# Altium PCB PCB1_lack.PcbDoc
Units mm, origin at the board's own origin, x right, y up, seen from the top; angles counter-clockwise.
Board outline 80.5 x 70 mm, 2 copper layers (Top Layer, Bottom Layer); 29 components, 19 nets, 81 pads, 17 vias.
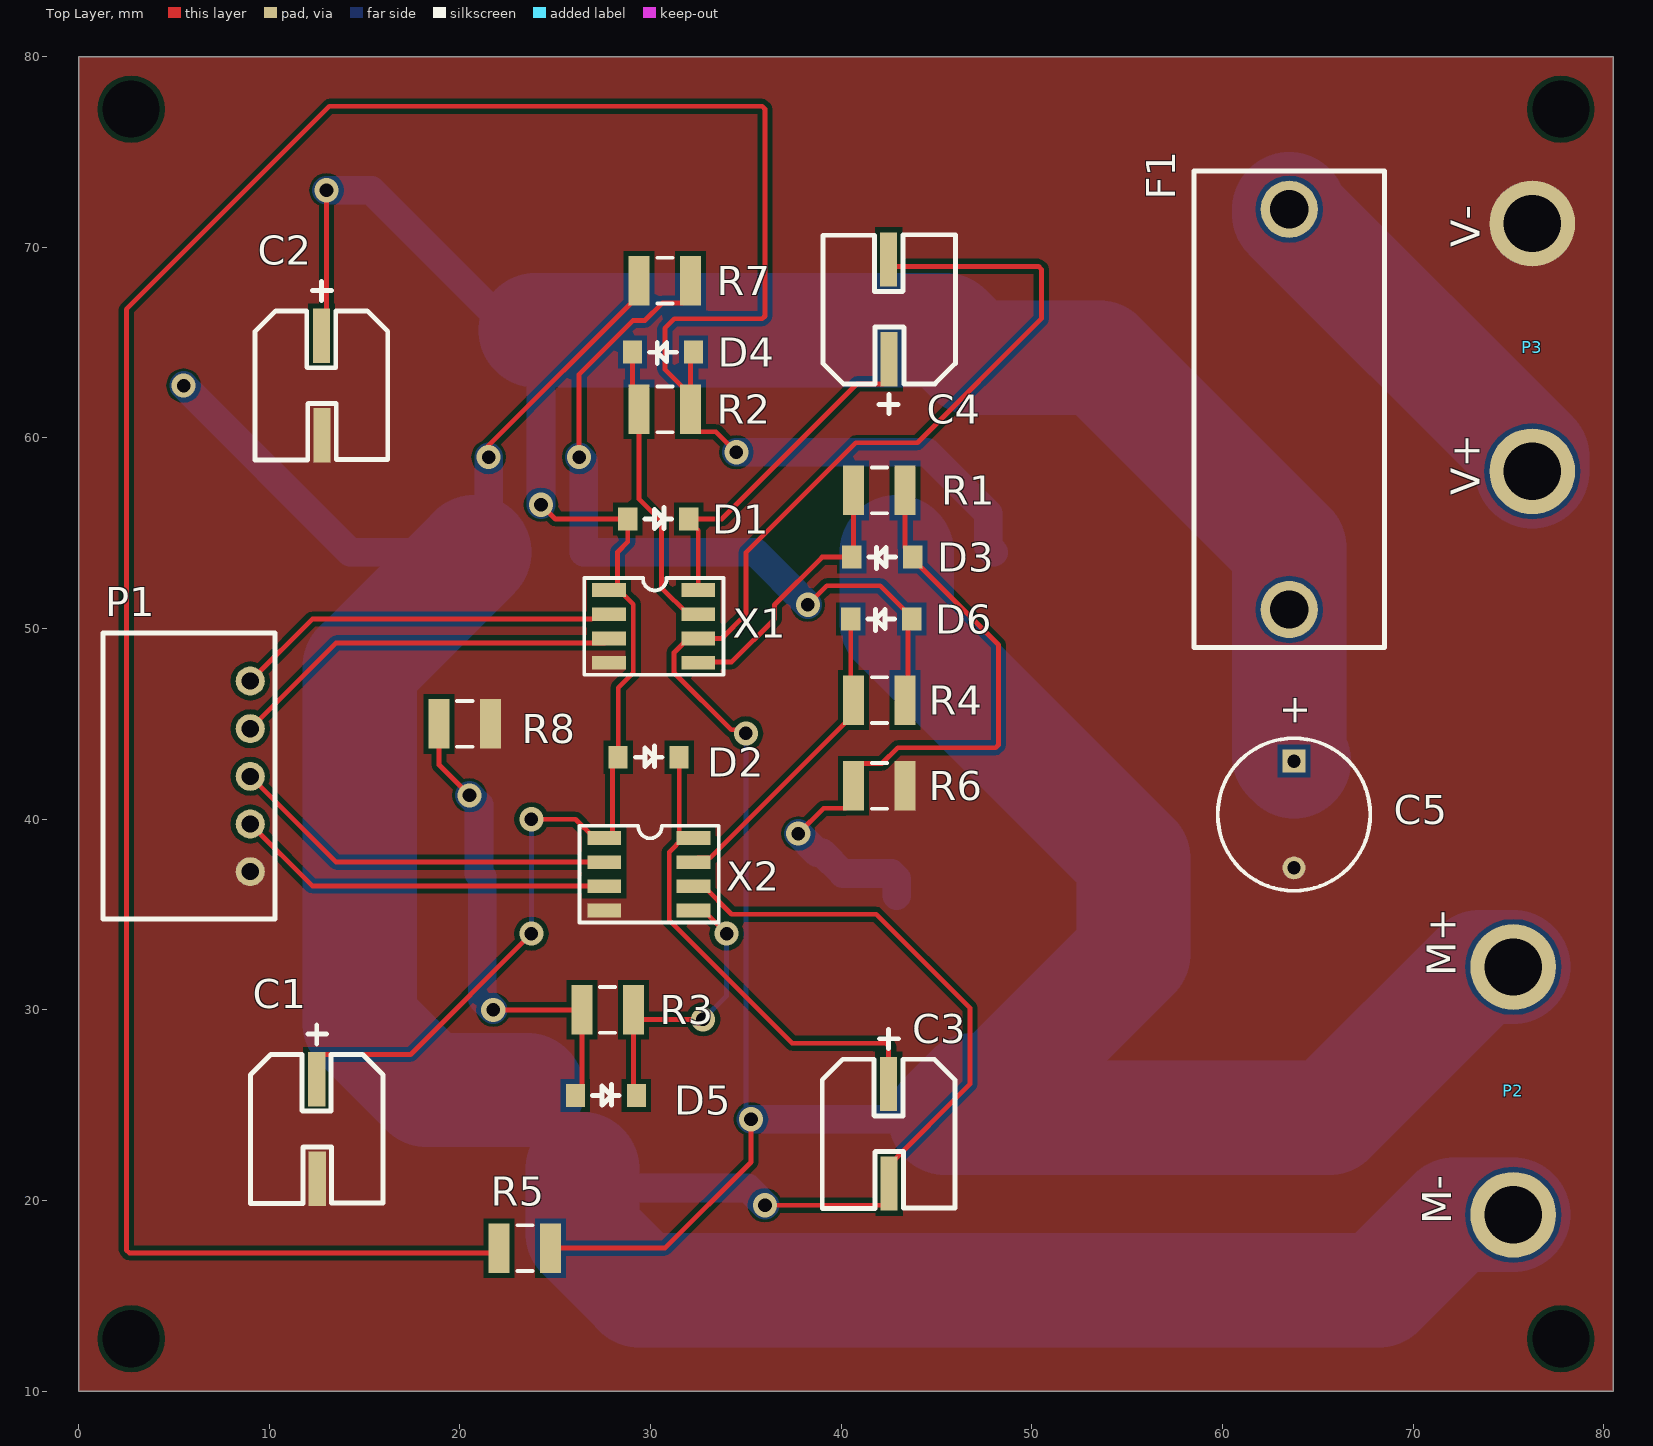
[diagram p0: Top Layer view]
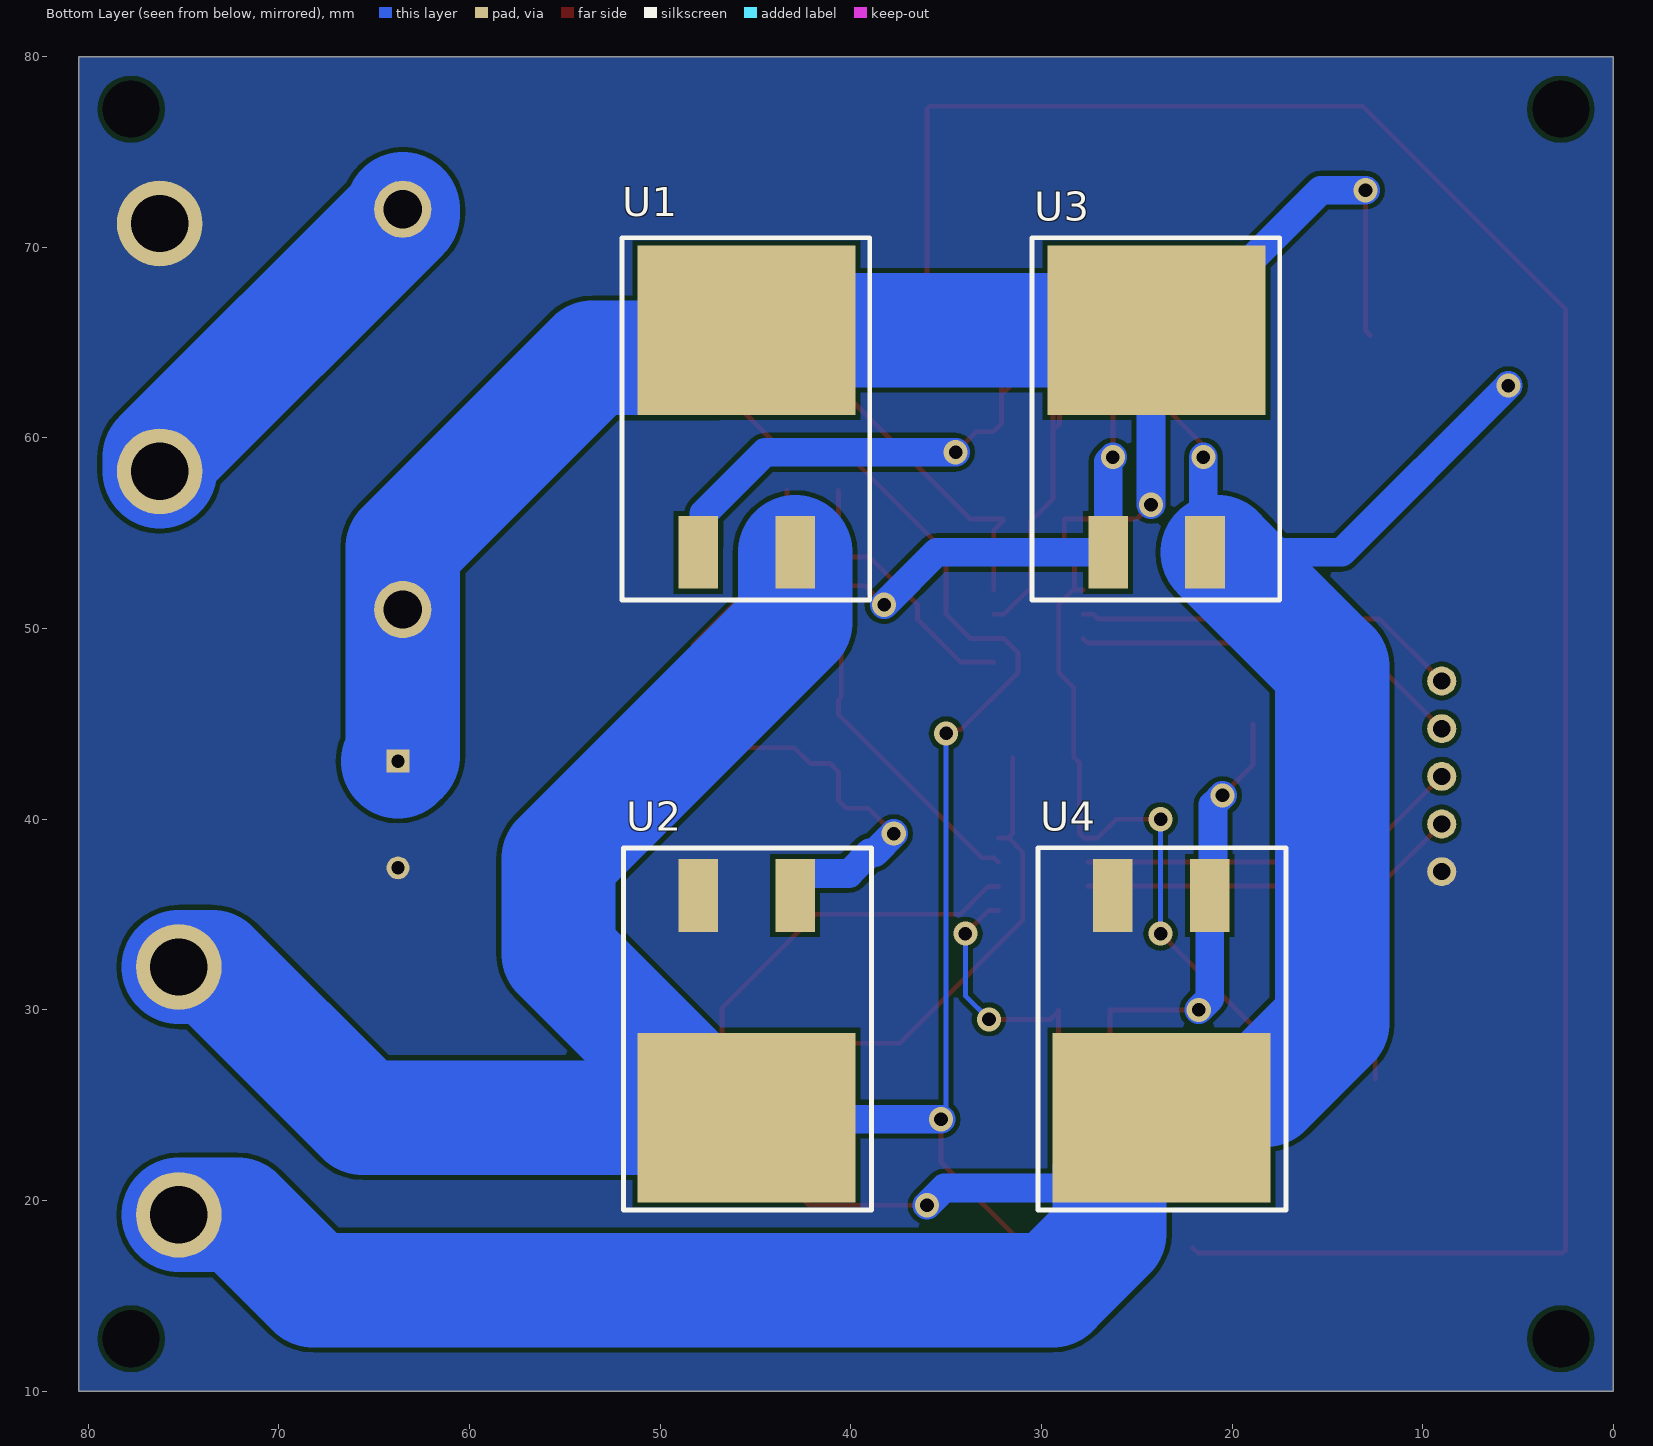
[diagram p1: Bottom Layer view, seen from below]

## Layer stack, top to bottom
Top Solder: solder mask 0.0102, Solder Resist, Dk 3.5
Top Layer: signal copper 0.0356
Dielectric 1: dielectric 0.32, FR-4, Dk 4.8
Bottom Layer: signal copper 0.0356
Bottom Solder: solder mask 0.0102, Solder Resist, Dk 3.5

## Board outline
0,10 0,80 80.5,80 80.5,10

## Design rules (kind name [scope] priority, off if disabled: settings)
Clearance [All] p1: gap=0.254 ignorepadtopadclearanceinfootprint=FALSE except(0: Arc-Hole Track-Hole SMDPad-Hole THPad-Hole Via-Hole Fill-Hole Poly-Hole Region-Hole Text-Hole)
PolygonConnect [All] p1: connectstyle=Direct reliefconductorwidth=0.254 reliefentries=4 polygonreliefangle="90 Angle" airgapwidth=0.254
RoutingVias [All] p1: holewidth=0.711 width=1.27 viastyle="Through Hole" minholewidth=0.711 minwidth=1.27 maxholewidth=0.711 maxwidth=1.27
SolderMaskExpansion [All] p1: expansion=0.102 istentingtop=FALSE
Width [All] p1: maxlimit=6 minlimit=0.254 preferedwidth=1.5 toplayer_prefwidth=0.254 minimp=50.000000 maximp=50.000000 favimp=50.000000
30 further rules are at their usual default settings.

## Components (designator, comment, footprint, x,y, rotation, side; value= is the part's Value field where it differs from the comment)
C1 "16V" "smd cap" 12.5,23.75 r180 top value="10 uF"
C2 "16V" "smd cap" 12.75,62.75 r180 top value="10 uF"
C3 "16V" "smd cap" 42.5,23.5 r180 top value=47uF
C4 "16V" "smd cap" 42.5,66.75 r0 top value=47uF
C5 "Cap Pol1" "Cap El" 63.75,40.25 r90 top value=25V
D1 "Diode" SOD123 28.8,55.75 r0 top
D2 "Diode" SOD123 28.3,43.25 r0 top
D3 "Diode" SOD123 43.75,53.75 r180 top
D4 "Diode" SOD123 32.25,64.5 r180 top
D5 "Diode" SOD123 26.05,25.5 r0 top
D6 "Diode" SOD123 43.7,50.5 r180 top
F1 "Fuse" FH-101 63.5,61.5 r90 top
P1 "jst5" JST5 9,47.25 r270 top
P2 "M_p" M_pin 75.25,25.75 r270 top
P3 "V_p" V_pin 176.25,700.75 r90 top
R1 "10 Om" 14-1210 42,57.25 r0 top value=1K
R2 "10 Om" 14-1210 30.75,61.5 r0 top
R3 "Res3" 14-1210 27.75,30 r180 top value="10 Om"
R4 "10 Om" 14-1210 42,46.25 r0 top value=1K
R5 "1 kOm" 14-1210 23.4,17.5 r180 top value=1K
R6 "Res3" 14-1210 42,41.75 r180 top value="1 kOm"
R7 "1 kOm" 14-1210 30.75,68.25 r0 top value=1K
R8 "1 kOm" 14-1210 20.25,45 r0 top value=1K
U1 "MOSFET" SMD220_10CTQ150 48,54 r180 bottom
U2 "MOSFET" SMD220_10CTQ150 42.92,36 r0 bottom
U3 "MOSFET" SMD220_10CTQ150 26.5,54 r180 bottom
U4 "MOSFET" SMD220_10CTQ150 21.17,36 r0 bottom
X1 "International Rectifier" SOIC8 27.82,52.02 r0 top
X2 "International Rectifier" SOIC8 27.57,39.02 r0 top

## Footprints (in the part's own frame and the unit in brackets; to place one, negate y for a bottom-side part, rotate by r counter-clockwise, add the part's x,y. Pads: shape width x height; smd on the part's side, far side on the other; paste and mask are expansions set on the pad)
14-1210 [mm] "Chip Resistor, Body 3.2x2.5mm, IPC High Density"
  rect 1.1x2.6 smd: 1(-1.35,0) 2(1.35,0)
  silkscreen extent -0.4,-1.2 0.4,1.2, body extent -1.68,-1.32 1.68,1.32, height 0.9
"Cap El" [mm] "Polarized Capacitor (Radial); 2 Leads"
  rect 1.2x1.2 hole 0.7: 1(2.8,0)
  round 1.2 hole 0.7: 2(-2.8,0)
  silkscreen extent -4,-4 4,4
FH-101 [mm]
  round 3 hole 2 paste+0.1: 1(-10.5,0) 2(10.5,0)
  silkscreen extent -12.5,-5 12.5,5
JST5 [mil]
  round 60 hole 35.43: 1(0,0) 2(98.43,0) 3(196.85,0) 4(295.28,0) 5(393.7,0)
  silkscreen extent -99,-304 491,51
M_pin [mm]
  round 4.5 hole 3 mask+0.2: 1(-6.5,0) 2(6.5,0)
SMD220_10CTQ150 [mm]
  rect 2.08x3.81 smd paste+0.1: 1(0,0) 3(5.08,0)
  rect 11.43x8.89 smd paste+0.1: 2(2.54,11.65)
  silkscreen extent -4,-2.5 9,16.5, body extent -2.5,-0.5 7.5,14.5, height 4.69
"smd cap" [mm]
  rect 0.9x2.85 smd: 1(0.013,-2.612) 2(-0.012,2.612)
  silkscreen extent -3.46,-5.46 3.5,3.91
SOD123 [mm]
  rect 1x1.2 smd: 1(0,0) 2(3.2,0)
  silkscreen extent 0.9,-0.5 2.3,0.6
SOIC8 [mm]
  rect 1.78x0.72 smd: 1(0,0) 2(0,-1.27) 3(0,-2.54) 4(0,-3.81) 5(4.68,-3.81) 6(4.68,-2.54) 7(4.68,-1.27) 8(4.68,0)
  silkscreen extent -1.3,-4.44 6,0.64, body extent -0.9,-4.45 5.58,0.63, height 1.75
V_pin [mm]
  round 4.5 hole 3 mask+0.2: 1(-642.5,100) 2(-629.5,100)

## Part data
C1 C2 C3 C4 C5: library part "Cap smd", "Polarized Capacitor (Radial)", LatestRevisionDate=17-Jul-2002, LatestRevisionNote="Re-released for DXP Platform.", PackageDescription="Polarized Capacitor (Radial); 2 Leads", PackageReference=RB7.6-15, Published=8-Jun-2000, Publisher="Altium Limited"
D1 D2 D3 D4 D5 D6: "Default Diode", Code_JEDEC=DO-214-AB, LatestRevisionDate=17-Jul-2002, LatestRevisionNote="Re-released for DXP Platform.", PackageDescription="DO-214-AB/SMC; 2 C-Bend Leads; Body 7.9 x 5.9 mm, inc. leads (LxW)", PackageReference=SMC, PackageVersion=Sep-1996, Published=8-Jun-2000, Publisher="Altium Limited"
F1: library part FH-101
P1: "Header, 5-Pin", LatestRevisionDate=17-Jul-2002, LatestRevisionNote="Re-released for DXP Platform.", Publisher="Altium Limited"
R1 R2 R4 R5 R7 R8: library part Res3, "Resistor", LatestRevisionDate=29-May-2009, LatestRevisionNote="IPC-7351 Footprint Added.", PackageDescription="Chip Resistor", PackageReference=J1-0603, Published=8-Jun-2000, Publisher="Altium Limited"
R3 R6: "Resistor", LatestRevisionDate=29-May-2009, LatestRevisionNote="IPC-7351 Footprint Added.", PackageDescription="Chip Resistor", PackageReference=J1-0603, Published=8-Jun-2000, Publisher="Altium Limited"
U1 U2 U3 U4: library part IRFZ14PBF, Configuration=Single, Qg=11nC, Qgd=5.8nC, Qgs=3.1nC, Vds=60V
X1 X2: library part IR2101SPBF

## Free pads (board coordinates)
  round 1.524 hole 3: 1(2.75,77.25) 2(77.75,77.25) 3(77.75,12.75) 4(2.75,12.75)

## Via types
v1: diameter 1.27, hole 0.711, Top Layer to Bottom Layer, 17 vias

## Nets (pads, with @x,y where several pads share a name; then routed paths per layer and width w, separated by ;. In a path a pad name is that pad's centre, name@x,y a point inside that pad or via, vN(x,y) a via of type N, cw(c..) or ccw(c..) an arc to the next point about the centre after c; other vN are vias at no path point)
GND: C1.2 C2.2 C5.2 P1.5 P3.2 R6.1 R8.2 U2.3 U4.3 X1.4 X2.4
NetC1_1: C1.1 C2.1 C5.1 D1.1 D2.1 F1.1 U1.2 U3.2 X1.1 X2.1 | length 135.1
  Top Layer w0.254: C1.1 12.487,27.337 12.81,27.66 17.41,27.66 v1(23.75,34) ; C2.1 13,65.625 v1(13,73) ; v1(23.75,40) 26.06,40 27.04,39.02 27.767,39.02 28,39.253 28,42.95 D2.1 28.3,46.901 29.091,47.692 29.091,51.279 28.35,52.02 X1.1 ; v1(24.25,56.5) 25,55.75 D1.1 28.8,54.7 28.8,54.55 28.265,54.015 X1.1@28.265,52.105
  Bottom Layer w0.254: v1(23.75,34) v1(23.75,40)
  Bottom Layer w1.5: v1(13,73) 15.34,73 22.69,65.65 U3.2 24.25,65.36 v1(24.25,56.5)
  Bottom Layer w6: U3.2 U1.2 46.905,64.205 53.545,64.205 63.5,54.25 F1.1 63.5,43.3 C5.1
NetC3_1: C3.1 D2.2 X2.8 | length 25.7
  Top Layer w0.254: D2.2 31.5,39.253 X2.8@31.733,39.02 ; X2.8 X2.8@31.733,39.02 ; C3.1 42.488,28.101 42.339,28.25 37.421,28.25 30.979,34.692 30.979,38.279 31.72,39.02 X2.8@31.733,39.02
NetC3_2: C3.2 P2.2 R7.1 U3.3 U4.2 X2.6 | length 179.7
  Top Layer w0.254: v1(21.5,59) 21.43,59.07 21.43,59.53 29.4,67.5 R7.1 ; X2.6 32.78,36.48 34.244,35.016 41.835,35.016 46.75,30.101 46.75,26.1 42.513,21.863 C3.2 42.513,20.073 42.19,19.75 v1(36,19.75)
  Bottom Layer w1.5: v1(5.5,62.75) 14.25,54 U3.3@20.75,54 ; U3.3 U3.3@20.75,54 ; v1(21.5,59) 21.5,54.75 U3.3@20.75,54 ; U4.2 26.425,21.635 27.405,20.655 35.095,20.655 v1(36,19.75)
  Bottom Layer w6: U3.3@20.75,54 14.746,47.996 14.746,29.314 18.265,25.795 U4.2@23.535,25.795 ; U4.2@26.425,21.635 26.425,18.289 29.414,15.3 68.2,15.3 72.15,19.25 P2.2
NetC4_1: C4.1 D1.2 X1.8 | length 18.5
  Top Layer w0.254: X1.8 32.5,55.15 32,55.65 D1.2 33.737,55.75 40.826,62.839 42.189,62.839 42.512,63.162 C4.1
NetC4_2: C4.2 P2.1 R5.1 U1.3 U2.2 X1.6 | length 163.3
  Top Layer w0.254: R5.1 30.75,17.5 35.266,22.016 v1(35.266,24.266) ; v1(35,44.5) 34.806,44.694 34.227,44.694 31.229,47.692 31.229,48.739 31.97,49.48 X1.6 33.73,49.48 35,50.75 35,53.989 40.761,59.75 44,59.75 50.5,66.25 50.5,68.851 50.351,69 42.81,69 42.487,69.323 C4.2
  Bottom Layer w0.254: v1(35,44.5) 35,24.807 35.266,24.541 v1(35.266,24.266)
  Bottom Layer w1.5: v1(35.266,24.266) 45.376,24.266 U2.2
  Bottom Layer w6: U1.3 42.92,50.33 55.33,37.92 55.33,32.95 48.175,25.795 46.905,25.795 U2.2 48.175,24.35 65.6,24.35 73.5,32.25 P2.1
NetD3_1: D3.1 R1.2 R6.2 U2.1 | length 35.7
  Top Layer w0.254: v1(37.75,39.25) 39.077,40.577 40.227,40.577 40.65,41 R6.2 40.65,42.5 41.073,42.923 42.134,42.923 42.961,43.75 48.101,43.75 48.25,43.899 48.25,49.15 43.75,53.65 D3.1 43.75,53.85 43.35,54.25 R1.2
  Bottom Layer w1.5: v1(37.75,39.25) 38.75,38.25 39,38.25 40.095,37.155 42.63,37.155 42.92,36.865 U2.1
NetD3_2: D3.2 R1.1 X1.5 | length 14.3
  Top Layer w0.254: X1.5 32.54,48.25 34.25,48.25 36.5,50.5 36.5,51.25 39,53.75 D3.2 40.65,53.85 R1.1
NetD4_1: D4.1 R2.2 R5.2 U1.1 | length 151
  Top Layer w0.254: R5.2 21.8,17.25 2.649,17.25 2.5,17.399 2.5,66.75 13.149,77.399 35.851,77.399 36,77.25 36,66.399 35.851,66.25 31.25,66.25 30.75,65.75 30.75,63.6 R2.2@32.1,62.25 ; D4.1 32.1,64.35 R2.2@32.1,62.25 ; v1(34.5,59.25) 33.423,60.327 32.523,60.327 32.1,60.75 R2.2 R2.2@32.1,62.25
  Bottom Layer w1.5: v1(34.5,59.25) 44.5,59.25 47.71,56.04 47.71,54.29 U1.1
NetD4_2: D4.2 R2.1 X1.7 | length 16.4
  Top Layer w0.254: D4.2 29.05,60.75 R2.1@29.3,60.5 ; R2.1 29.4,56.789 30.569,55.62 30.569,52.151 31.97,50.75 X1.7
NetD5_1: D5.1 R3.2 R8.1 U4.1 | length 25.5
  Top Layer w0.254: R8.1 18.9,42.85 v1(20.5,41.25) ; v1(21.75,30) R3.2 26.4,25.85 D5.1
  Bottom Layer w1.5: v1(20.5,41.25) 21,40.75 21,37.155 21.17,36.985 21.17,30.58 v1(21.75,30)
NetD5_2: D5.2 R3.1 X2.5 | length 15.6
  Top Layer w0.254: R3.1 R3.1@29.1,29.923 ; D5.2 29.1,25.65 R3.1@29.1,29.923 ; X2.5 32.78,35.21 33.882,34.108 33.882,34.102 v1(33.984,34) ; v1(32.75,29.5) 29.523,29.5 R3.1@29.1,29.923
  Bottom Layer w0.254: v1(32.75,29.5) 33.984,30.734 v1(33.984,34)
NetD6_1: D6.1 R4.2 R7.2 U3.1 | length 41.7
  Top Layer w0.254: v1(26.25,59) 26.25,63.339 29.079,66.167 29.706,66.167 30.616,67.077 31.677,67.077 32.1,67.5 R7.2 ; v1(38.25,51.25) 39.25,52.25 42.05,52.25 43.7,50.6 D6.1 43.5,50.3 43.5,46.4 R4.2
  Bottom Layer w1.5: v1(26.25,59) 26.5,58.75 U3.1 35.5,54 v1(38.25,51.25)
NetD6_2: D6.2 R4.1 X2.7 | length 16.7
  Top Layer w0.254: X2.7 32.483,37.983 33.133,37.983 40.65,45.5 R4.1 40.5,46.4 D6.2
NetF1_2: F1.2 P3.1 | length 19
  Bottom Layer w6: F1.2 63.5,71.75 76.25,59 P3.1
NetP1_1: P1.1 X1.2 | length 20.3
  Top Layer w0.254: P1.1 12.25,50.5 26.908,50.5 26.925,50.517 27.057,50.517 27.29,50.75 X1.2
NetP1_2: P1.2 X1.3 | length 20.8
  Top Layer w0.254: P1.2 13.5,49.25 27.59,49.25 X1.3
NetP1_3: P1.3 X2.2 | length 20.4
  Top Layer w0.254: P1.3 13.5,37.75 X2.2
NetP1_4: P1.4 X2.3 | length 19.9
  Top Layer w0.254: P1.4 12.25,36.5 27.55,36.5 X2.3

## Polygon pours and split planes (outlines as drawn)
GND on Top Layer "GND_L01_P011" (solid, remove dead copper, pour order 11): 0,80 80.5,80 80.5,10 0,10
no net on Top Layer "NONET_L01_P010" (solid, pour order 10): -5.75,7.75
no net on Top Layer "NONET_L01_P000" (solid, pour order 0): 0.25,80
GND on Bottom Layer "GND_L02_P012" (solid, remove dead copper, pour order 12): 0,80 80.5,80 80.5,10 0,10

## Silkscreen, mask and mechanical layers (free items; w line width, h text height)
Mechanical 1:
  the board outline again, w1

## Text inside footprints (layer, text, board x,y; h text height)
C5: Top Overlay "+" at 64.45,44.85 h1.5 r90
P2: Top Overlay "M-" at 71.996,18.754 h1.52 r90; Top Overlay "M+" at 72.246,31.754 h1.52 r90
P3: Top Overlay "V-" at 73.496,70.004 h1.52 r90; Top Overlay "V+" at 73.496,57.004 h1.52 r90